# Altium PCB KNX_POE.PcbDoc
Units mm, origin at the board's own origin, x right, y up, seen from the top; angles counter-clockwise.
Board outline 41.5 x 56.6 mm, 2 copper layers (Top Layer, Bottom Layer); 11 components, 6 nets, 25 pads, 47 vias.
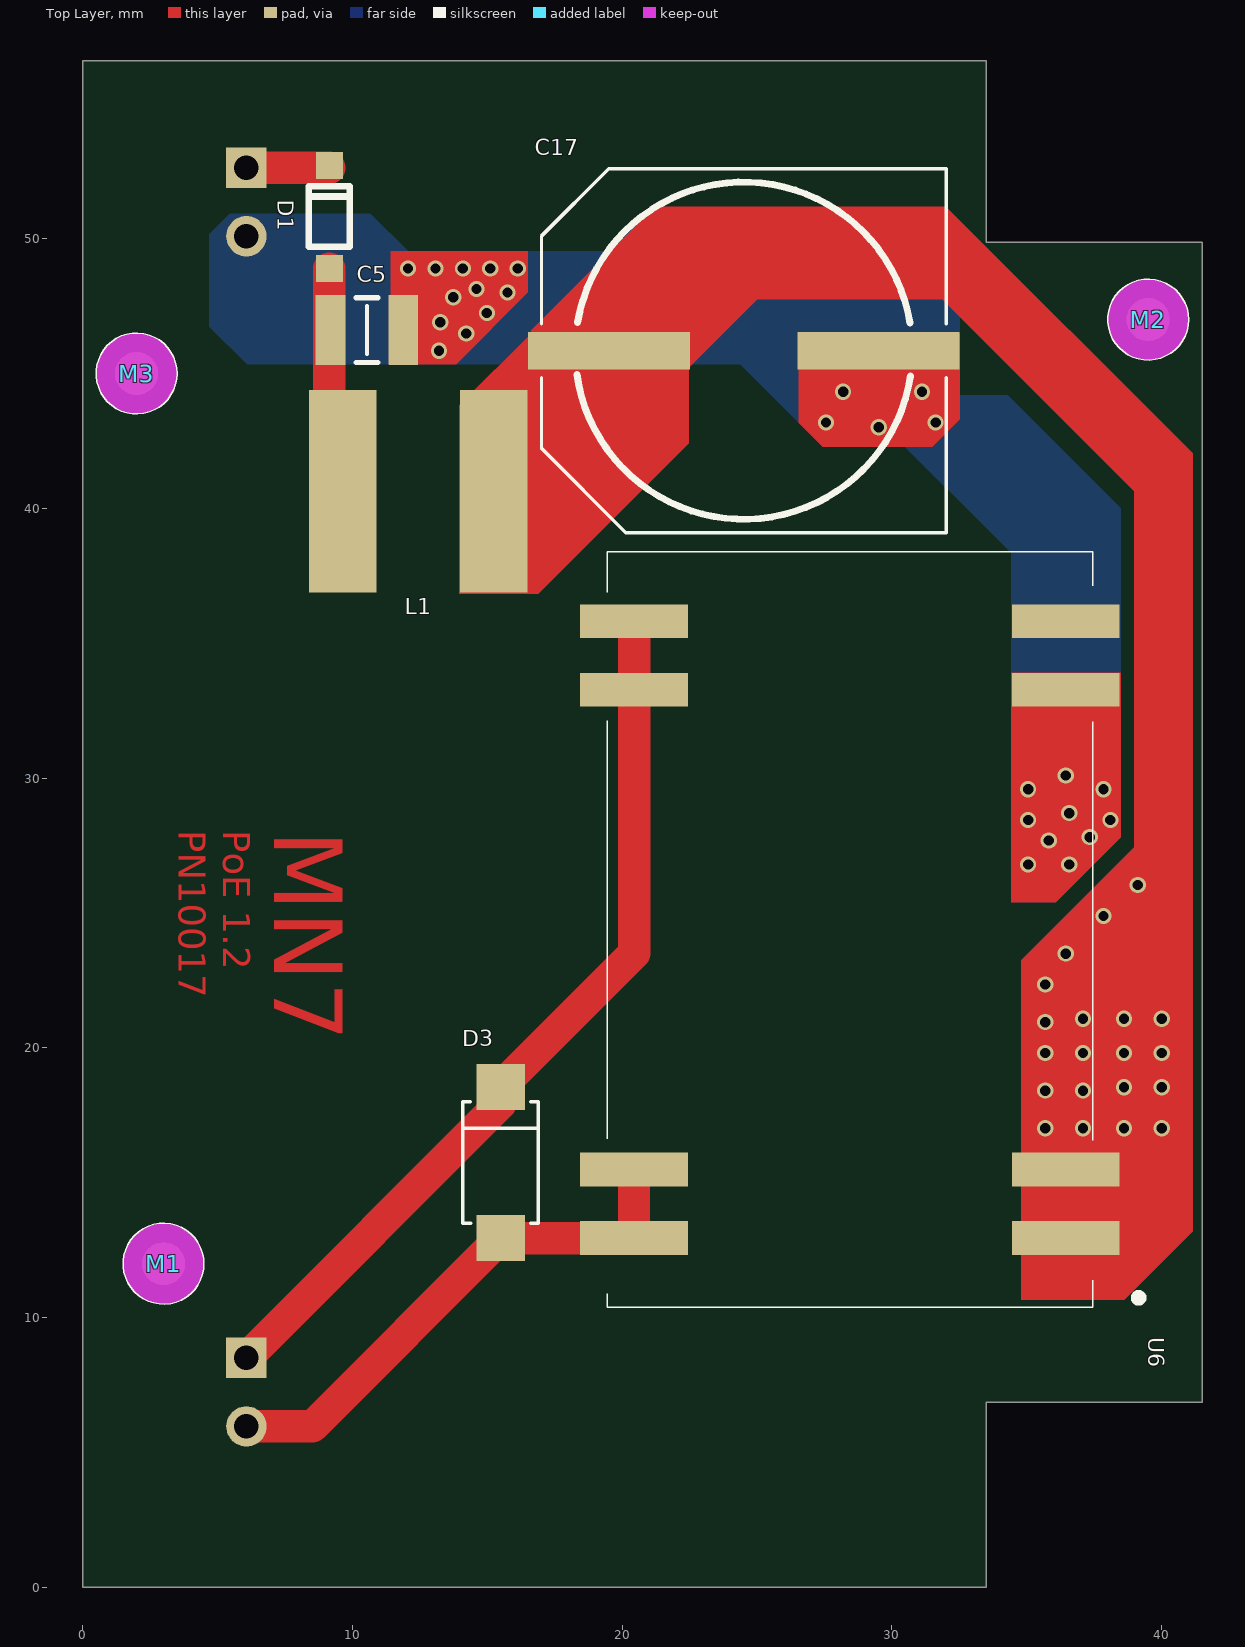
[diagram p0: Top Layer view]
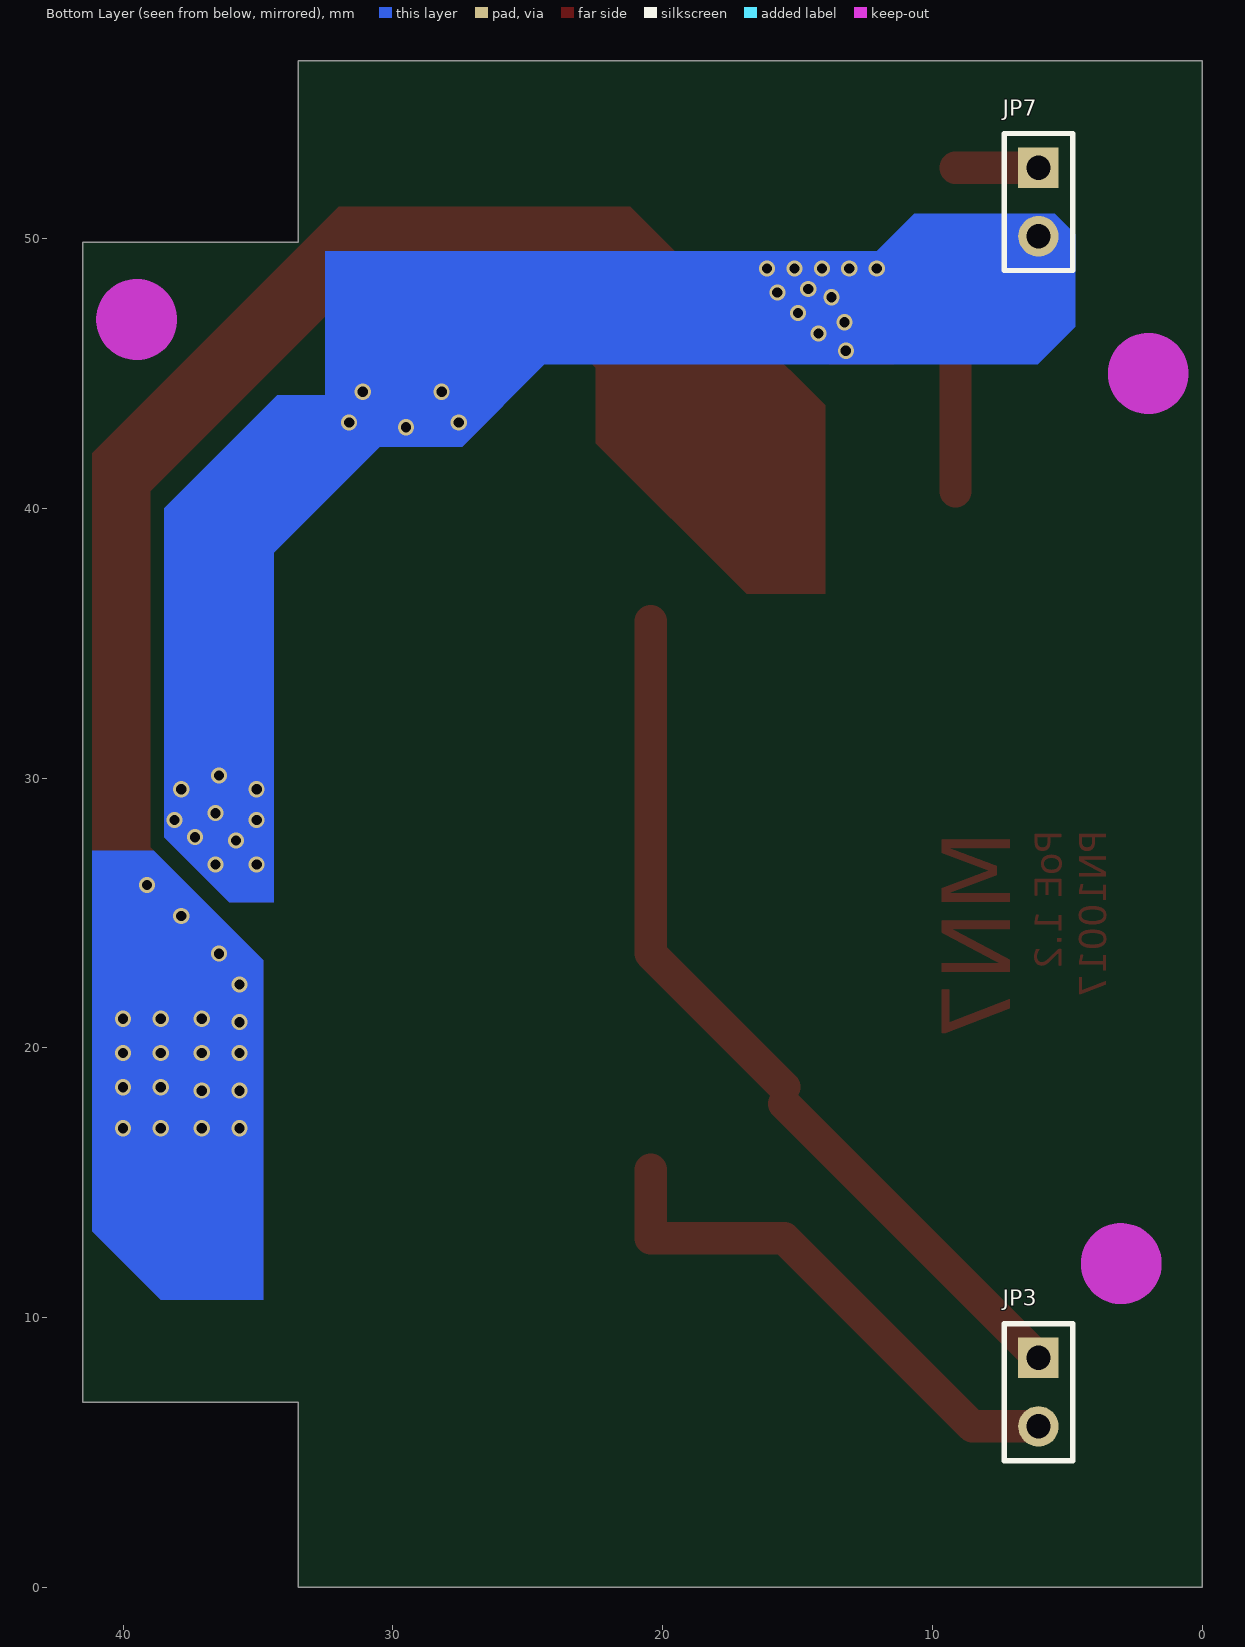
[diagram p1: Bottom Layer view, seen from below]

## Layer stack, top to bottom
Top Solder: solder mask 0.0102, Solder Resist, Dk 3.5
Top Layer: signal copper 0.0356
Dielectric 1: dielectric 0.32, FR-4, Dk 4.8
Bottom Layer: signal copper 0.0356
Bottom Solder: solder mask 0.0102, Solder Resist, Dk 3.5

## Board outline
0,0 0,56.6 33.503,56.6 33.503,49.86 41.504,49.86 41.504,6.858 33.503,6.858 33.503,0

## Design rules (kind name [scope] priority, off if disabled: settings)
Clearance [All] p1: gap=0.254
ComponentClearance [All] p1: gap=0 collisioncheckmode=3 verticalgap=0 showdistances=TRUE
MinimumSolderMaskSliver [All] p1: minsoldermaskwidth=0.1
PolygonConnect [All] p1: connectstyle=Relief reliefconductorwidth=0.254 reliefentries=4 polygonreliefangle="90 Angle" airgapwidth=0.254
RoomDefinition KNX_POE [InComponentClass('KNX_POE')] p1: confinementstyle=ConfineIn formatcopy=TRUE lockcomponents=FALSE outline -4.318,-0.889 42.164,-0.889 42.164,57.404 -4.318,57.404
RoutingVias [All] p1: holewidth=0.711 width=1.27 viastyle="Through Hole" minholewidth=0.3 minwidth=0.4 maxholewidth=0.711 maxwidth=1.27
SilkToBoardRegionClearance [(HasFootprint('Mark-3mm') AND IsEmbeddedBoard)] p1:
SilkToSolderMaskClearance [IsPad] p1: minsilkscreentomaskgap=0.04 clearancetoexposedcopper=TRUE
SolderMaskExpansion [All] p1: expansion=0.102
UnpouredPolygon [All] p1: allowunpoured=FALSE
Width [All] p1: maxlimit=2 minlimit=0.254 preferedwidth=0.85
25 further rules are at their usual default settings.

## Components (designator, comment, footprint, x,y, rotation, side; value= is the part's Value field where it differs from the comment)
C5 "10uF50V_1210" C1210 10.541,46.609 r0 top
C17 "470uF25V_POL" Panasonic-H13 24.511,45.847 r180 top
D1 "RB160M-30TR" SOD123 9.144,50.8 r90 top
D3 "SMAJ58A-E3/61" DO214A 15.494,15.748 r90 top
JP3 "Plug_2_90_2.54" HDR1X2-down 6.071,7.239 r270 bottom
JP7 "Plug_2_90_2.54" HDR1X2-down 6.071,51.359 r270 bottom
L1 "10uH2A" WE-PD2_1 12.446,40.64 r180 top
M1 "Mark" Mark-3mm 3,12 r0 top
M2 "Mark" Mark-3mm 39.5,47 r0 top
M3 "Mark" Mark-3mm 2,45 r0 top
U6 "AG-9812M" Ag9812M 28.448,24.384 r90 top

## Footprints (in the part's own frame and the unit in brackets; to place one, negate y for a bottom-side part, rotate by r counter-clockwise, add the part's x,y. Pads: shape width x height; smd on the part's side, far side on the other; paste and mask are expansions set on the pad)
Ag9812M [mm] "Silvertel, Ag9812M"
  rect 1.25x4 smd: 1(-11.43,-8) 1(-8.89,-8) 2(8.89,-8) 3(11.43,-8) 4(8.89,8) 4(11.43,8) 5(-11.43,8) 5(-8.89,8)
  silkscreen extent -14,-10.84 14,9, body extent -14,-9 14,9, height 12
C1210 [mm] "Chip Capacitor, Body 3.2x2.5mm, IPC High Density"
  rect 1.1x2.6 smd: 1(-1.35,0) 2(1.35,0)
  silkscreen extent -0.4,-1.2 0.4,1.2, body extent -1.6,-1.25 1.6,1.25, height 1.35
DO214A [mm] "Diode; 2 Leads"
  rect 1.7x1.8 smd: 1(2.8,0) 2(-2.8,0)
  silkscreen extent -2.25,-1.4 2.25,1.4, body extent -2.25,-1.4 2.25,1.4, height 2.3
HDR1X2-down [mm] "Connector; Header; 2 Position"
  rect 1.5x1.5 hole 0.9: 1(-1.27,0)
  round 1.5 hole 0.9: 2(1.27,0)
  silkscreen extent -2.54,-1.27 2.54,1.27, body extent -2.55,-0.33 2.53,10.03, height 2.57
Mark-3mm [mm]
  round 1.6 smd paste-2: 0(0,0)
  Keep-Out Layer circle w2: c0,0 r0.5
  silkscreen extent -1.5,-1.5 1.5,1.5
Panasonic-H13 [mm] "SMD electrolytic, Panasonic"
  rect 6x1.4 smd: 1(5,0) 2(-5,0)
  silkscreen extent -7.5,-6.75 7.5,6.75, body extent -7.5,-6.75 7.5,6.75, height 13
SOD123 [mm]
  rect 1x1 smd: 1(1.905,0) 2(-1.905,0)
  silkscreen extent -1.1,-0.76 1.14,0.76, body extent -1.4,-0.85 1.4,0.88, height 1.4
WE-PD2_1 [mm]
  rect 2.5x7.5 smd: 1(-2.794,0) 2(2.794,0)
  body extent -3.82,-3.5 3.81,3.5, height 5

## Part data
C5: "AVX,  X7R, 10%, 50V"
C17: "Panasonic, TG series"
D1: "Diode Schottky,2A,40V"
D3: "TVS, 400W, 58V"
JP3 JP7: "Plug, 2-Pin"
L1: library part 10uH2A_WE-PD2, "WE-PD2, 10uH2A"
U6: "PoE, 12V"

## Via types
v1: diameter 0.6, hole 0.381, Top Layer to Bottom Layer, 47 vias

## Nets (pads, with @x,y where several pads share a name; then routed paths per layer and width w, separated by ;. In a path a pad name is that pad's centre, name@x,y a point inside that pad or via, vN(x,y) a via of type N, cw(c..) or ccw(c..) an arc to the next point about the centre after c; other vN are vias at no path point)
GND: C5.2 C17.2 JP7.2 U6.2 | length 6
  Top Layer w0.85: v1(29.511,43.006) C17.2 ; v1(36.448,30.1) U6.2
  other v1: 35.052,26.797 36.576,26.797 35.814,27.686 37.338,27.813 35.052,28.448 38.1,28.448 36.576,28.702 35.052,29.591 37.846,29.591 27.559,43.18 31.623,43.18 28.194,44.323 31.115,44.323 13.208,45.847 14.224,46.482 13.259,46.901 14.986,47.244 13.741,47.828 15.748,48.006 14.605,48.133 12.065,48.895 13.081,48.895 14.097,48.895 15.113,48.895 16.129,48.895
NetC5_1: C5.1 D1.2 L1.2 | length 8.3
  Top Layer w0.85: C5.1@9.144,46.656 C5.1
  Top Layer w1.2: L1.2@9.144,40.64 C5.1@9.144,46.609 ; C5.1@9.144,46.656 D1.2
NetC17_1: C17.1 L1.1 U6.1 | length 61
  Top Layer w0.85: C17.1@18.923,45.847 C17.1 22.305,48.641 33.02,48.641 40.132,41.529 40.132,19.178 36.448,15.494 U6.1@36.448,12.954
  Top Layer w1: L1.1@14.986,41.91 C17.1@18.923,45.847
  other v1: 35.687,17.018 37.084,17.018 38.608,17.018 40.005,17.018 35.687,18.415 37.084,18.415 38.608,18.542 40.005,18.542 35.687,19.812 37.084,19.812 38.608,19.812 40.005,19.812 35.687,20.955 37.084,21.082 38.608,21.082 40.005,21.082 35.687,22.352 36.449,23.495 37.846,24.892 39.116,26.035
NetD1_1: D1.1 JP7.1 | length 3.1
  Top Layer w1.2: JP7.1 D1.1@9.144,52.629
NetD3_1: D3.1 JP3.1 U6.4 | length 33.3
  Top Layer w0.85: D3.1@15.494,17.932 D3.1
  Top Layer w1.2: JP3.1 D3.1@15.494,17.932 ; D3.1 20.448,23.502 20.448,33.274 U6.4@20.448,35.814
NetD3_2: D3.2 JP3.2 U6.5 | length 19.8
  Top Layer w0.85: U6.5@20.442,15.488 U6.5@20.448,15.494
  Top Layer w1.2: JP3.2 8.515,5.969 D3.2 20.442,12.948 U6.5@20.442,15.488
pads on no net: M1.0 M2.0 M3.0 U6.3

## Other copper
Top Layer:
  region net GND: 26.543,46.482 26.543,43.18 27.432,42.291 31.496,42.291 32.512,43.307 32.512,46.482
  region net NetC17_1: 16.637,45.339 16.764,45.212 22.479,45.212 25.019,47.752 31.877,47.752 38.989,40.64 38.989,27.432 34.798,23.241 34.798,10.668 38.608,10.668 41.148,13.208 41.148,42.037 32.004,51.181 21.209,51.181 16.637,46.609
  region net GND: 34.417,33.909 34.417,25.4 36.068,25.4 38.481,27.813 38.481,33.909
  region net NetC17_1: 16.637,46.482 13.97,43.815 13.97,36.83 16.891,36.83 22.479,42.418 22.479,45.212
  region net GND: 11.43,45.339 13.843,45.339 16.51,48.006 16.51,49.53 11.43,49.53
  text "PN10017" at 3.556,28.067 h1 r270
  text "PoE 1.2" at 5.207,28.067 h1 r270
  text "MN7" at 7.112,28.067 h2.54 r270
Bottom Layer:
  region net NetC17_1: 34.798,10.668 38.608,10.668 41.148,13.208 41.148,27.305 38.862,27.305 34.798,23.241
  region net GND: 26.543,43.18 29.591,43.18 34.417,38.354 34.417,25.4 36.068,25.4 38.481,27.813 38.481,40.005 34.29,44.196 32.258,44.196
  region net GND: 26.543,46.482 26.543,43.18 27.432,42.291 31.496,42.291 32.512,43.307 32.512,46.482
  region net GND: 11.43,49.53 11.43,45.466 11.303,45.339 24.384,45.339 27.432,42.291 32.512,42.291 32.512,49.53
  region net GND: 12.065,49.53 10.668,50.927 5.461,50.927 4.699,50.165 4.699,46.736 6.096,45.339 12.065,45.339

## Silkscreen, mask and mechanical layers (free items; w line width, h text height)
Top Solder:
  text "MN7" at 7.112,28.067 h2.54 r270
Outline:
  the board outline again, w0.254